# Altium PCB SPI-I2C-Shield.PcbDoc
Units mm, origin at the board's own origin, x right, y up, seen from the top; angles counter-clockwise.
Board outline 50.1 x 34.1 mm, 2 copper layers (Top Layer, Bottom Layer); 12 components, 12 nets, 46 pads, 16 vias.
Unrouted connection lines stored in the file: 2.
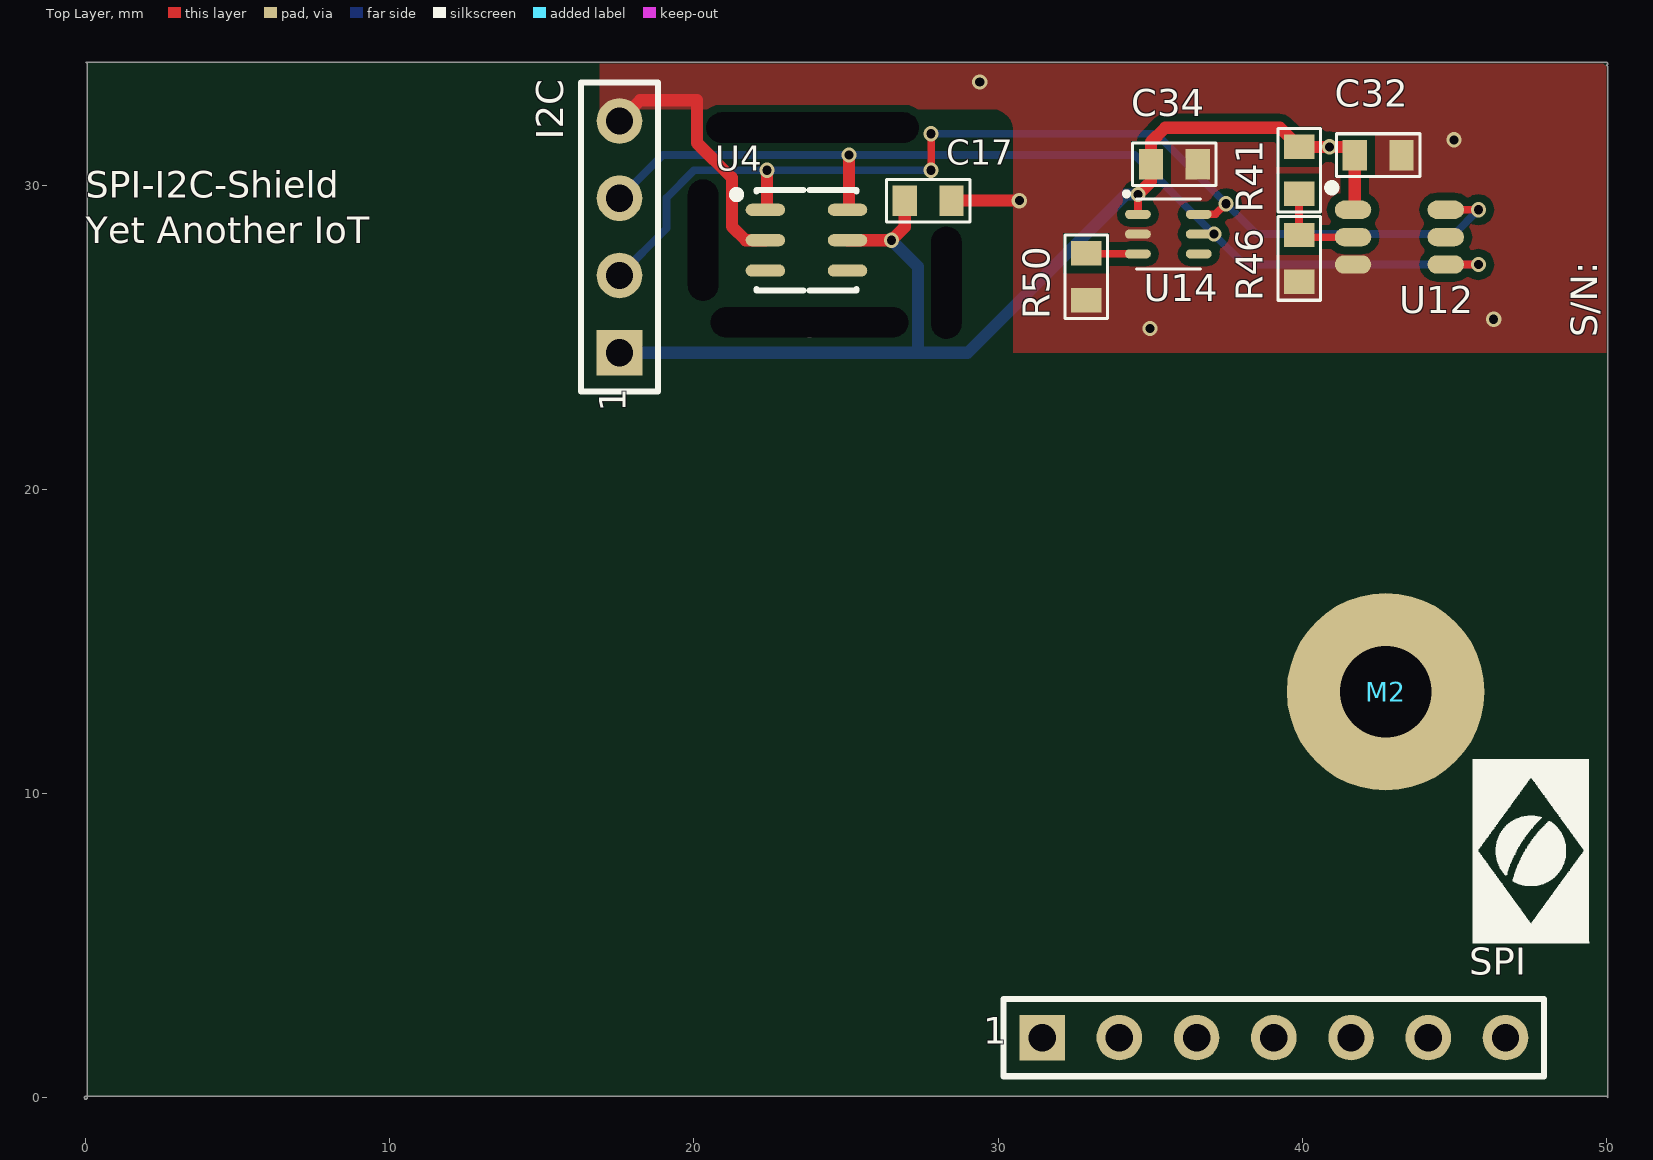
[diagram p0: Top Layer view]
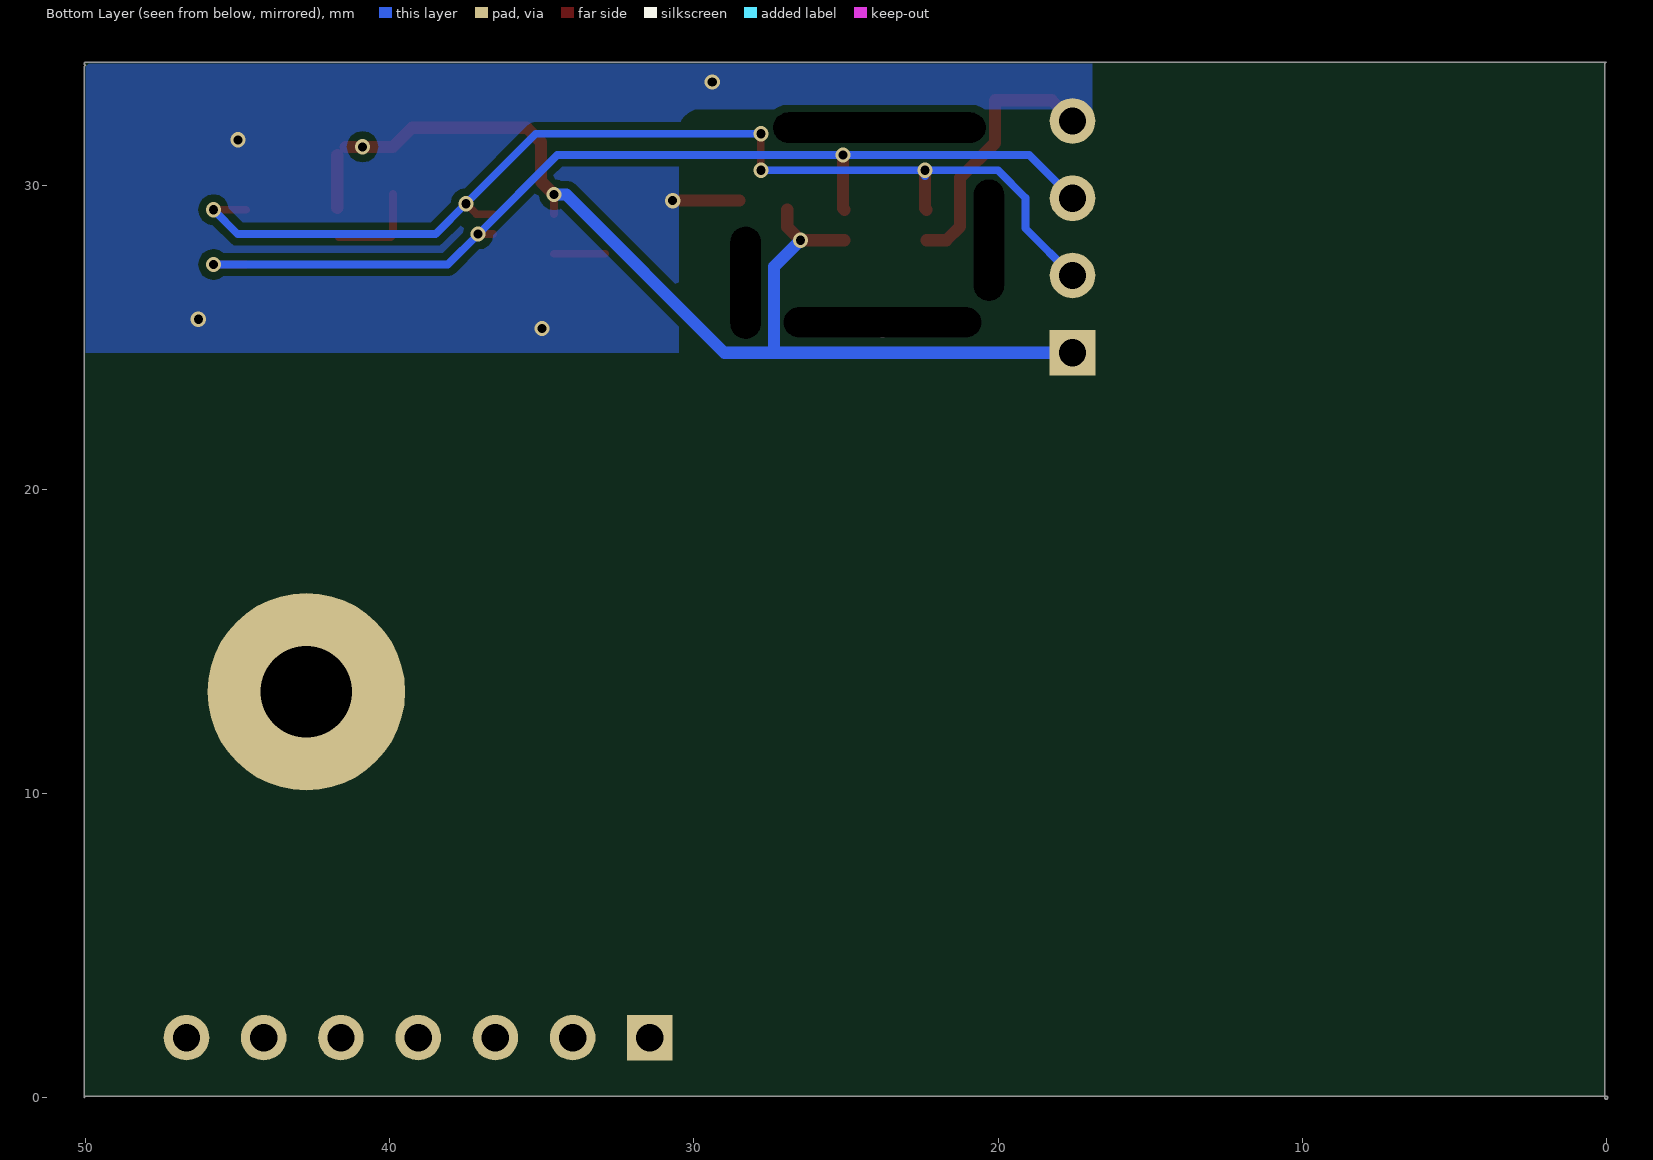
[diagram p1: Bottom Layer view, seen from below]
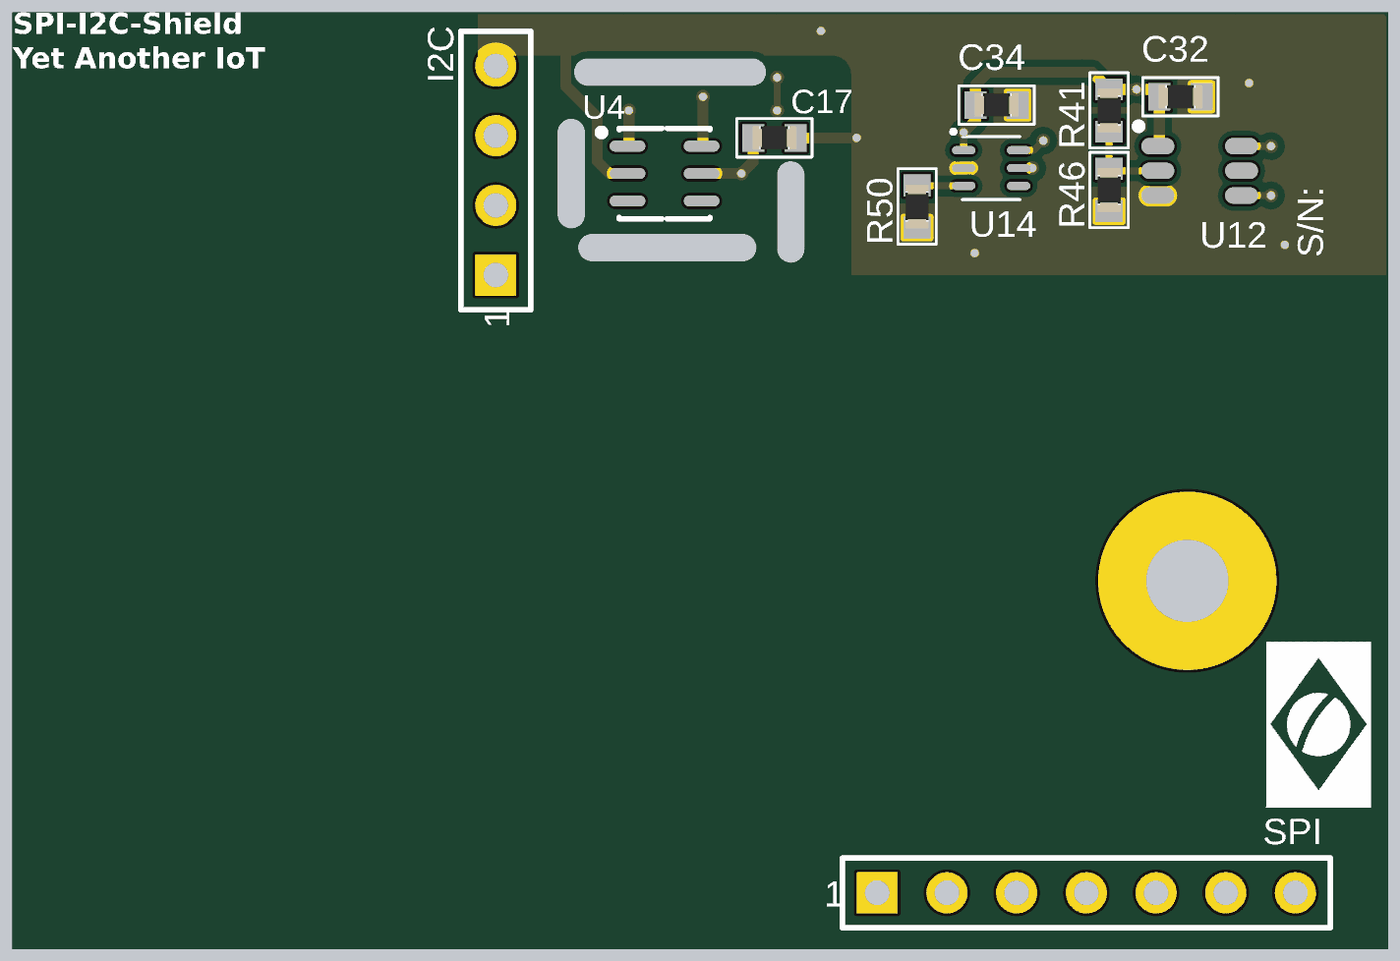
[diagram p2: 3D render of the assembled board from above, using the file's embedded part models]

## Layer stack, top to bottom
Top Solder: solder mask 0.0102, Solder Resist, Dk 3.5
Top Layer: signal copper 0.0356
Dielectric 1: dielectric 0.32, FR-4, Dk 4.8
Bottom Layer: signal copper 0.0356
Bottom Solder: solder mask 0.0102, Solder Resist, Dk 3.5

## Board outline
0,-0.05 cw(c0,0) -0.05,0 cw(c0,0) 0,0.05 50,0.05 cw(c50,0) 50.05,0 50.05,33.9 ccw(c50,33.9) 50.006,33.95 ccw(c50,34) 50.05,34 ccw(c50,34) 50,34.05 0,34.05 cw(c0,34) 0.05,34 0.05,0 cw(c0,0)

## Design rules (kind name [scope] priority, off if disabled: settings)
Clearance [All] p1: gap=0.254 ignorepadtopadclearanceinfootprint=FALSE except(0: Arc-Hole Track-Hole SMDPad-Hole THPad-Hole Via-Hole Fill-Hole Poly-Hole Region-Hole Text-Hole)
PolygonConnect [All] p1: connectstyle=Direct reliefconductorwidth=0.254 reliefentries=4 polygonreliefangle="90 Angle" airgapwidth=0.254
RoutingVias [All] p1: holewidth=0.711 width=1.27 viastyle="Through Hole" minholewidth=0.711 minwidth=1.27 maxholewidth=0.711 maxwidth=1.27
SolderMaskExpansion [All] p1: expansion=0.102
Width [All] p1: maxlimit=10 minlimit=0.254 preferedwidth=0.254
30 further rules are at their usual default settings.

## Components (designator, comment, footprint, x,y, rotation, side; value= is the part's Value field where it differs from the comment)
C17 "Capacitor Cerâmico" CC0603 27.7,29.5 r180 top value=100nF
C32 "Capacitor Cerâmico" CC0603 42.5,31 r180 top value=100nF
C34 "Capacitor Cerâmico" CC0603 35.8,30.7 r180 top value=100nF
I2C "Header 4" "CONN HDR1X4" 17.55,24.5 r90 top locked value="Macho - 4 Polos"
M2 "Furo de Fixação" Furo_M3 42.75,13.35 r0 top locked value=M3
R41 "Resistor" CC0603 39.9,30.5 r90 top value=0R
R46 "Resistor" CC0603 39.9,27.6 r90 top value=0R
R50 "Resistor" CC0603 32.9,27 r90 top value=499K
SPI "Header 7" "CONN HDR1X7" 31.45,1.975 r0 top locked value="Barra de 40 pinos - ATENÇÃO"
U4 "SI7006" QFN3x3-6P 23.7,28.2 r0 top
U12 "TSL2561T" TSL2561-TMB6 43.2,28.3 r0 top
U14 "ISL29023" QFN2x2-6 35.6,28.4 r0 top

## Footprints (in the part's own frame and the unit in brackets; to place one, negate y for a bottom-side part, rotate by r counter-clockwise, add the part's x,y. Pads: shape width x height; smd on the part's side, far side on the other; paste and mask are expansions set on the pad)
CC0603 [mm] "Chip Resistor, 2-Leads, Body 1,6x0,8mm, IPC Medium Density"
  rect 0.8x1 smd: 1(-0.77,0) 2(0.77,0)
  silkscreen extent -1.38,-0.7 1.38,0.7, body extent -0.8,-0.42 0.8,0.43, height 0.45
"CONN HDR1X4" [mm] "Connector; Header; 4 Position"
  rect 1.5x1.5 hole 0.9: 1(0,0)
  round 1.5 hole 0.9: 2(2.54,0) 3(5.08,0) 4(7.62,0)
  silkscreen extent -1.27,-1.27 8.89,1.27
"CONN HDR1X7" [mm] "Connector; Header; 7 Position"
  rect 1.5x1.5 hole 0.9: 1(0,0)
  round 1.5 hole 0.9: 2(2.54,0) 3(5.08,0) 4(7.62,0) 5(10.16,0) 6(12.7,0) 7(15.24,0)
  silkscreen extent -1.27,-1.27 16.51,1.27
Furo_M3 [mm] "Furo metalizado para parafuso M3"
  round 6.5 hole 3 paste+0: X(0,0)
QFN2x2-6 [mm]
  oval 0.85x0.3 smd: 1(-1,0.65) 2(-1,0) 3(-1,-0.65) 4(1,-0.65) 5(1,0) 6(1,0.65)
  silkscreen extent -1.42,-1.15 1.05,1.37, body extent -1.05,-1 1.05,1, height 0.75
QFN3x3-6P [mm]
  oval 1.3x0.4 smd: 1(-1.35,1) 2(-1.35,0) 3(-1.35,-1) 4(1.35,-1) 5(1.35,0) 6(1.35,1)
  silkscreen extent -2.42,-1.65 1.65,1.65, body extent -1.5,-1.5 1.5,1.5, height 1.21
TSL2561-TMB6 [mm]
  oval 1.2x0.6 smd: 1(-1.525,0.9) 2(-1.525,0) 3(-1.525,-0.9) 4(1.525,-0.9) 5(1.525,0) 6(1.525,0.9)
  silkscreen extent -2.35,1.5 -2.1,1.75, body extent -1.9,-1.3 1.9,1.3, height 1.35

## Part data
C17 C32 C34: library part "Cap 100nF 25V 0603 X7R", "Capacitor (Semiconductor SIM Model)", Supplier Part Number 1=490-1524-1-ND, Tolerância=±10%, ChinesePrice=0,00246, Chinês=Local, ComponentLink1Description=Datasheet, ComponentLink1URL=D:\Tecnoclade\Datasheet\!DataMissing.pdf, Corrente=*A, Obs=X7R, Potência=*W, Supplier 1=Digi-Key, Tensão=25V
I2C: "Header, 4-Pin", Supplier Part Number 1=A26509-40-ND, ChinesePrice=0,10000, Chinês="Proved - Local", ComponentLink1Description=Datasheet, ComponentLink1URL=D:\Tecnoclade\Datasheet\!DataMissing.pdf, Obs="Barra de 40 pinos - ATENÇÃO", Supplier 1=Digi-Key
M2: library part Parafuso, "Furo para parafuso", Supplier Part Number 1=--Del, ChinesePrice=0,00000, Chinês=----, ComponentLink1Description=Datasheet, ComponentLink1URL=D:\Tecnoclade\Datasheet\!DataMissing.pdf, Supplier 1=Digi-Key
R41 R46: library part "Res 0R 0603 1/10W", Supplier Part Number 1=P0.0GCT-ND, Tolerância=Jumper, ChinesePrice=0,00089, Chinês=Local, ComponentLink1Description=Datasheet, ComponentLink1URL=D:\Tecnoclade\Datasheet\!DataMissing.pdf, Corrente=*A, Potência=1/10W, Supplier 1=Digi-Key, Tensão=*V
R50: library part "Res 499K 1% 0603 1/10W", Supplier Part Number 1=311-499KHRCT-ND, Tolerância=1±*%, ChinesePrice=0,00000, Chinês=----, ComponentLink1Description=Datasheet, ComponentLink1URL=D:\Tecnoclade\Datasheet\!DataMissing.pdf, Corrente=*A, Potência=1/10W, Supplier 1=Digi-Key, Tensão=*V
SPI: "Header, 7-Pin", Supplier Part Number 1=A26509-40-ND, ChinesePrice=0,10000, Chinês="Proved - Local", ComponentLink1Description=Datasheet, ComponentLink1URL=D:\Tecnoclade\Datasheet\!DataMissing.pdf, Supplier 1=Digi-Key
U4: "SI7021-A20-GM1", Supplier Part Number 1=336-3141-ND, ChinesePrice=0,00000, Chinês=----, ComponentLink1Description=Datasheet, ComponentLink1URL=https://www.silabs.com/Support%20Documents%2FTechnicalDocs%2FSi7006-A20.pdf, Supplier 1=Digi-Key
U12: "Lux Meter", Supplier Part Number 1=TSL2561-TCT-ND, ChinesePrice=0,00000, Chinês=----, ComponentLink1Description=Datasheet, ComponentLink1URL=https://www.silabs.com/Support%20Documents%2FTechnicalDocs%2FSi7006-A20.pdf, Supplier 1=Digi-Key
U14: "Lux Meter", Supplier Part Number 1=ISL29023IROZ-T7CT-ND, ChinesePrice=0,00000, Chinês=----, ComponentLink1Description=Datasheet, ComponentLink1URL=https://www.silabs.com/Support%20Documents%2FTechnicalDocs%2FSi7006-A20.pdf, Supplier 1=Digi-Key

## Free pads (board coordinates)
  round 0 hole 1 slot 4 at 90 deg unplated paste+0 mask+0: 2(20.3,28.2)
  round 1 hole 1 slot 6.5 at 0 deg unplated paste+0 mask+0: 2(23.8,25.5)
  round 1 hole 1 slot 7 at 0 deg unplated paste+0 mask+0: 2(23.9,31.9)
  round 1 hole 1 slot 3.7 at 90 deg unplated paste+0 mask+0: 2(28.3,26.8)

## Via types
v1: diameter 0.5, hole 0.3, Top Layer to Bottom Layer, tented both sides, 16 vias

## Nets (pads, with @x,y where several pads share a name; then routed paths per layer and width w, separated by ;. In a path a pad name is that pad's centre, name@x,y a point inside that pad or via, vN(x,y) a via of type N, cw(c..) or ccw(c..) an arc to the next point about the centre after c; other vN are vias at no path point)
3V3: C17.2 C32.2 C34.2 I2C.1 R41.2 U4.5 U12.1 U14.1 | length 37.1
  Top Layer w0.254: U14.1 v1(34.6,29.7)
  Top Layer w0.4: U4.5 v1(26.5,28.2) 26.93,28.63 C17.2@26.93,29.2 ; v1(34.6,29.7) 35.03,30.13 C34.2 35.03,31.43 35.5,31.9 39.27,31.9 R41.2 v1(40.9,31.27) C32.2@41.46,31.27 ; U12.1@41.73,29.255 C32.2
  Bottom Layer w0.4: I2C.1 29,24.5 34.2,29.7 v1(34.6,29.7) ; v1(26.5,28.2) 27.37,27.33 27.37,24.5
CS: SPI.3
DRDY: SPI.7
GND: C17.1 C32.1 C34.1 I2C.4 R46.1 R50.1 SPI.2 U4.2 U12.3 U14.2 | length 8.7
  Top Layer w0.4: I2C.4 18.23,32.8 20.1,32.8 20.1,31.4 21.246,30.254 21.246,28.654 21.7,28.2 U4.2
  other v1: 35,25.3 46.3,25.6 45,31.5 29.4,33.4
MISO: SPI.6
MOSI: SPI.5
NetR41_1: R41.1 R46.2 U12.2 | length 3.1
  Top Layer w0.254: R46.2 R41.1 ; R46.2@39.97,28.3 U12.2
NetR50_2: R50.2 U14.3 | length 1.7
  Top Layer w0.254: R50.2@32.92,27.75 U14.3
SCK: SPI.4
SCL: I2C.3 U4.6 U12.4 U14.5 | length 33.8
  Top Layer w0.254: U14.5 v1(37.1,28.4) ; U12.4 v1(45.8,27.4)
  Top Layer w0.4: U4.6 25.1,29.25 v1(25.1,31)
  Bottom Layer w0.254: I2C.3 18.97,31 v1(25.1,31) ; v1@25.05,30.95 v1(25.1,31) ; v1(45.8,27.4) 38.1,27.4 v1(37.1,28.4) 34.5,31 v1(25.1,31)
SDA: I2C.2 U4.1 U12.6 U14.6 | length 36.8
  Top Layer w0.254: v1(27.8,30.5) v1(27.8,31.7) ; U14.6 37.15,29.05 v1(37.5,29.4) ; U12.6 v1(45.8,29.2)
  Top Layer w0.4: U4.1 22.4,29.25 v1(22.4,30.5)
  Bottom Layer w0.254: I2C.2 19.1,28.59 19.1,29.6 20,30.5 v1(22.4,30.5) ; v1@22.4,30.3 v1(22.4,30.5) ; v1(27.8,30.5) v1(22.4,30.5) ; v1(27.8,31.7) 35.2,31.7 v1(37.5,29.4) 38.5,28.4 45,28.4 v1(45.8,29.2)
VCC: SPI.1
pads on no net: M2.X U4.3 U4.4 U12.5 U14.4
copper on no net: | length 2.1
  Top Layer w0.4: 28.5,29.5 v1@30.63,29.5
  other v1: 30.7,29.5

## Polygon pours and split planes (outlines as drawn)
GND on Top Layer "Top Layer-No Net" (solid, remove dead copper, pour order 10): 49.9,34 50,33.9 50,24.5 47.9,24.5 30.5,24.5 30.5,29.3 30.5,31.8 ccw(c29.8,31.8) 29.8,32.5 17.4,32.5 16.9,32.3 16.9,34 49.9,34
GND on Bottom Layer "Top Layer-No Net" (solid, remove dead copper, pour order 12): 49.9,34 50,33.9 50,24.5 47.9,24.5 30.5,24.5 30.5,29.3 30.5,31.8 ccw(c29.8,31.8) 29.8,32.5 17.4,32.5 16.9,32.3 16.9,34 49.9,34

## Silkscreen, mask and mechanical layers (free items; w line width, h text height)
Top Overlay:
  drawing of 846 lines, arcs and shapes, not listed
  text "SPI-I2C-Shield / Yet Another IoT" at 0,27.8 h1.5
  text "S/N:" at 50,25 h1.5 r90
Mechanical 29:
  lines w0.1: 0,29.972 0,33.9 ; 34.29,0 50,0 ; 50,0 50,34 0,34 0,0 50,0

## Text inside footprints (layer, text, board x,y; h text height)
I2C: Top Overlay "1" at 18.046,22.565 h1.5 r90
SPI: Top Overlay "1" at 29.515,1.479 h1.5